# Altium PCB 矩形板V6.0(可制造).pcbdoc (part 1 of 2)
Units mm, origin at the board's own origin, x right, y up, seen from the top; angles counter-clockwise.
Board outline 153.79 x 190.97 mm, 2 copper layers (Top Layer, Bottom Layer); 164 components, 217 nets, 711 pads, 294 vias.
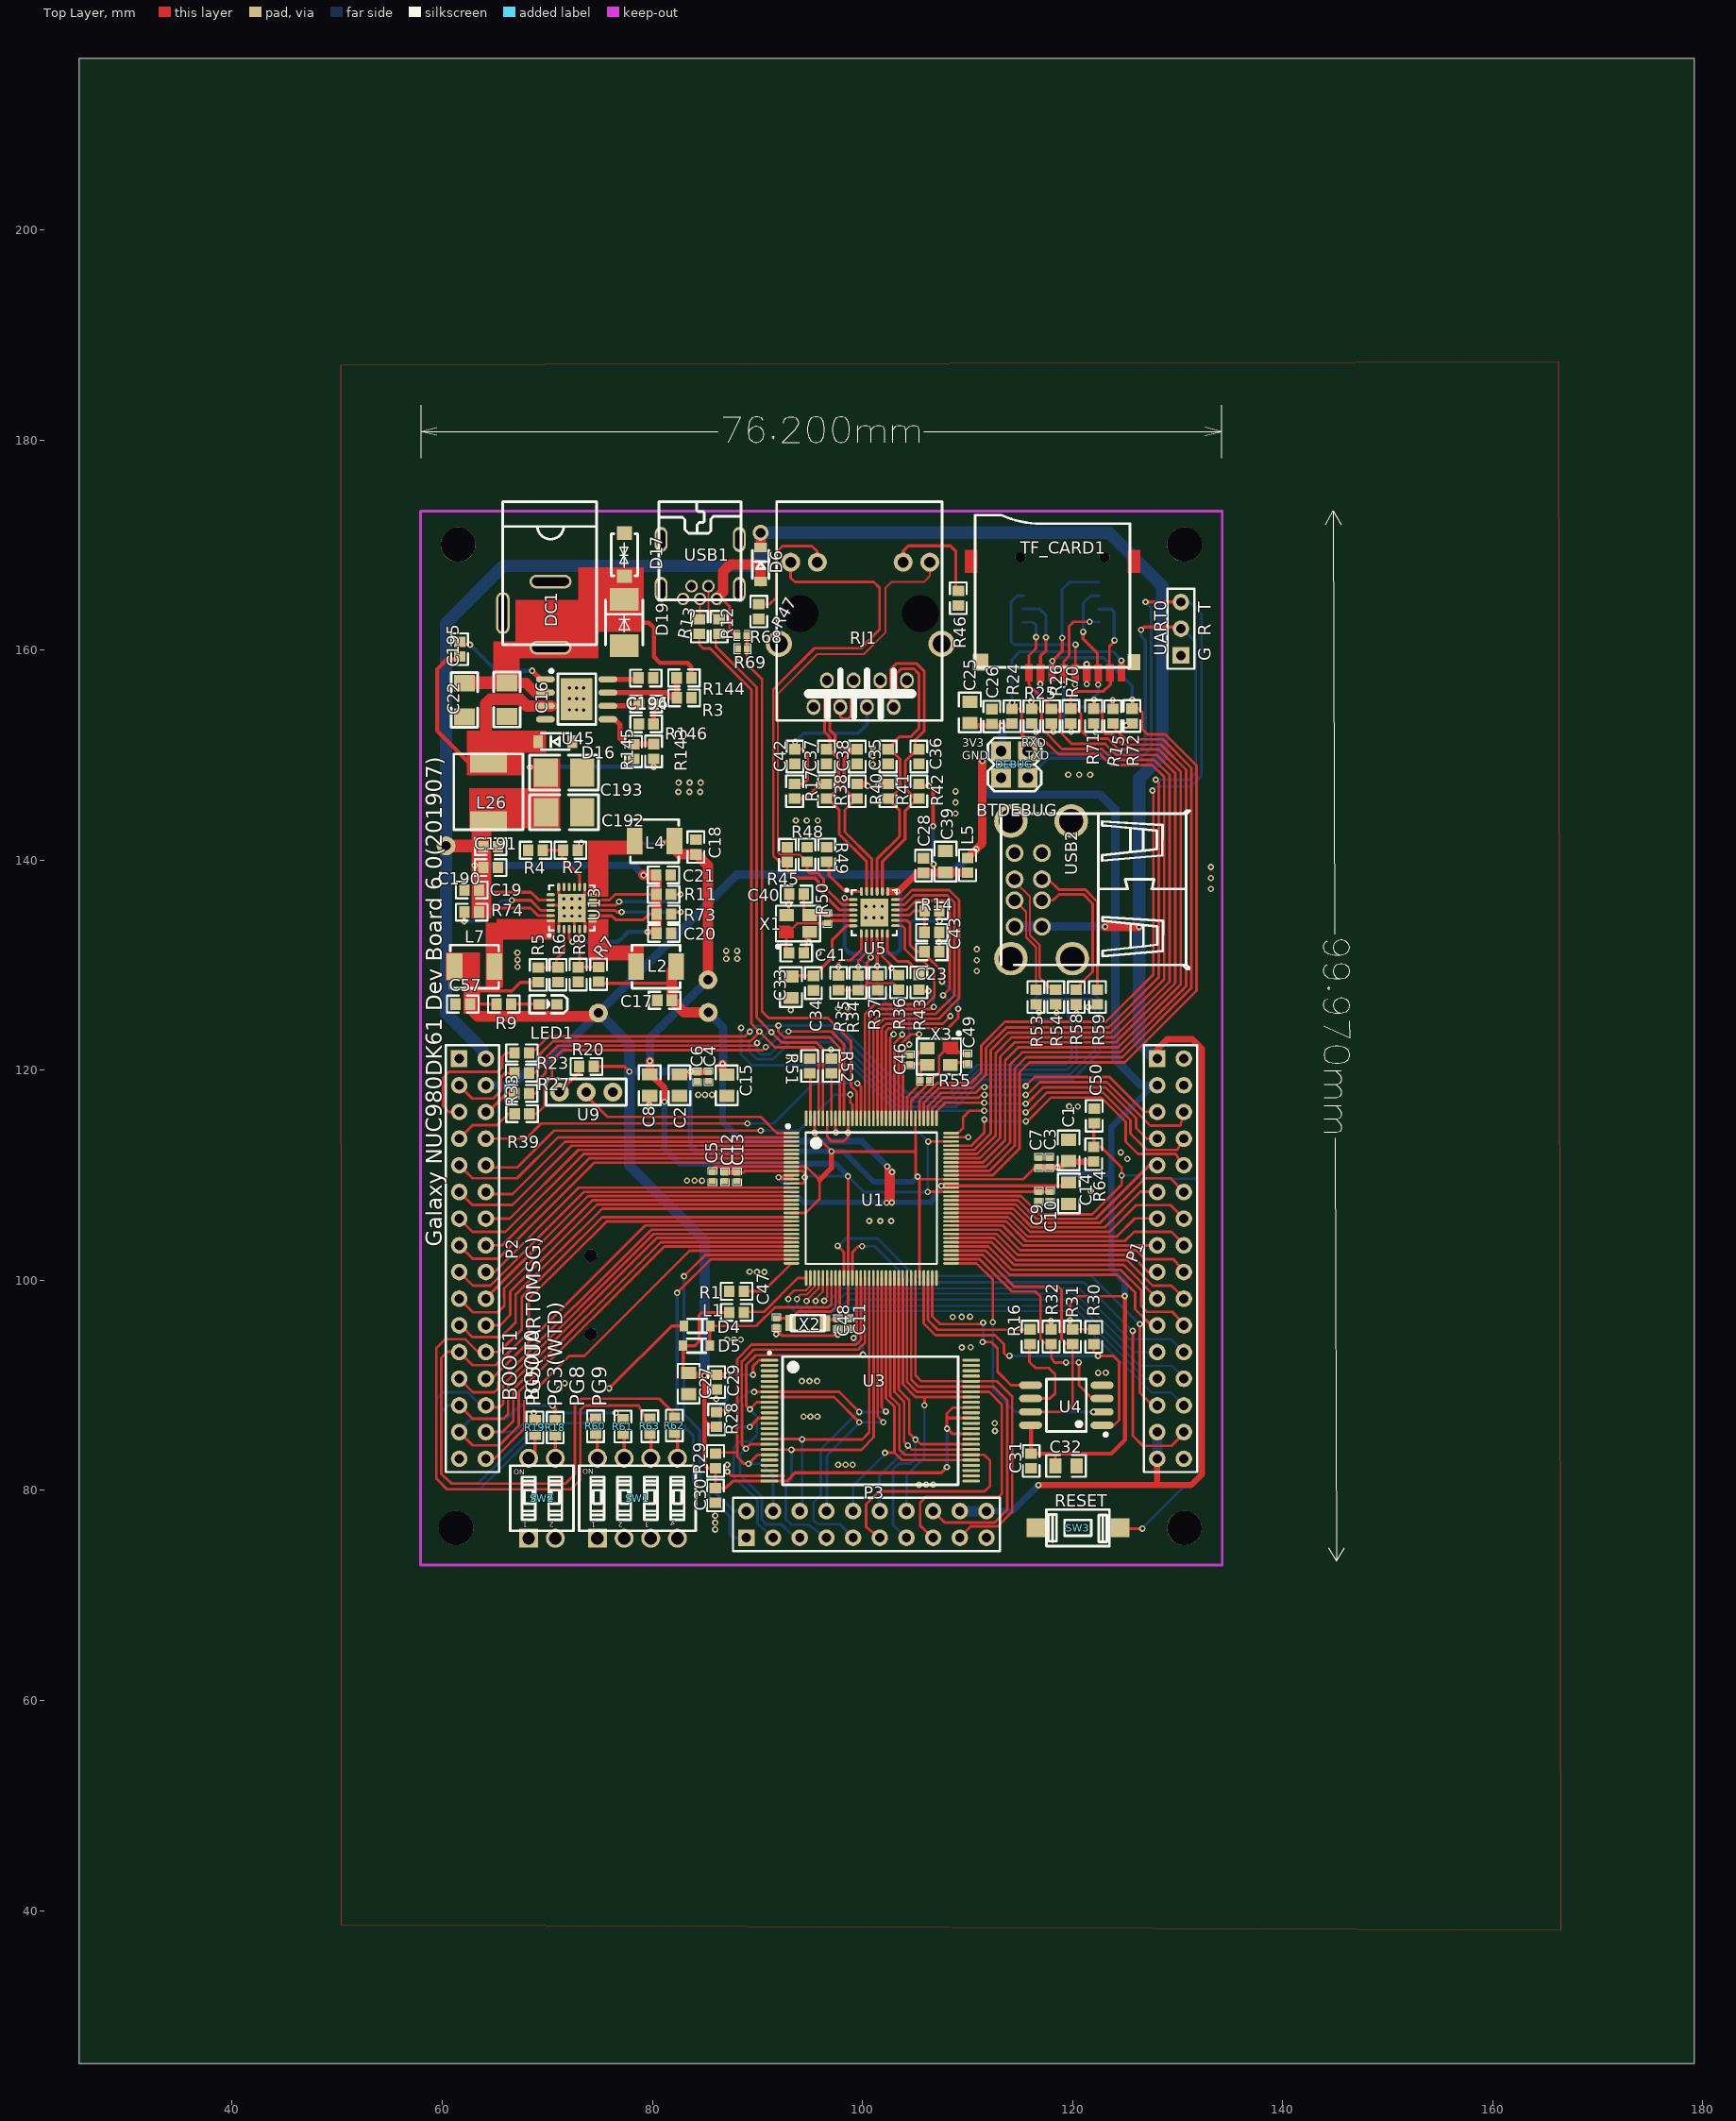
[diagram p0: Top Layer view]
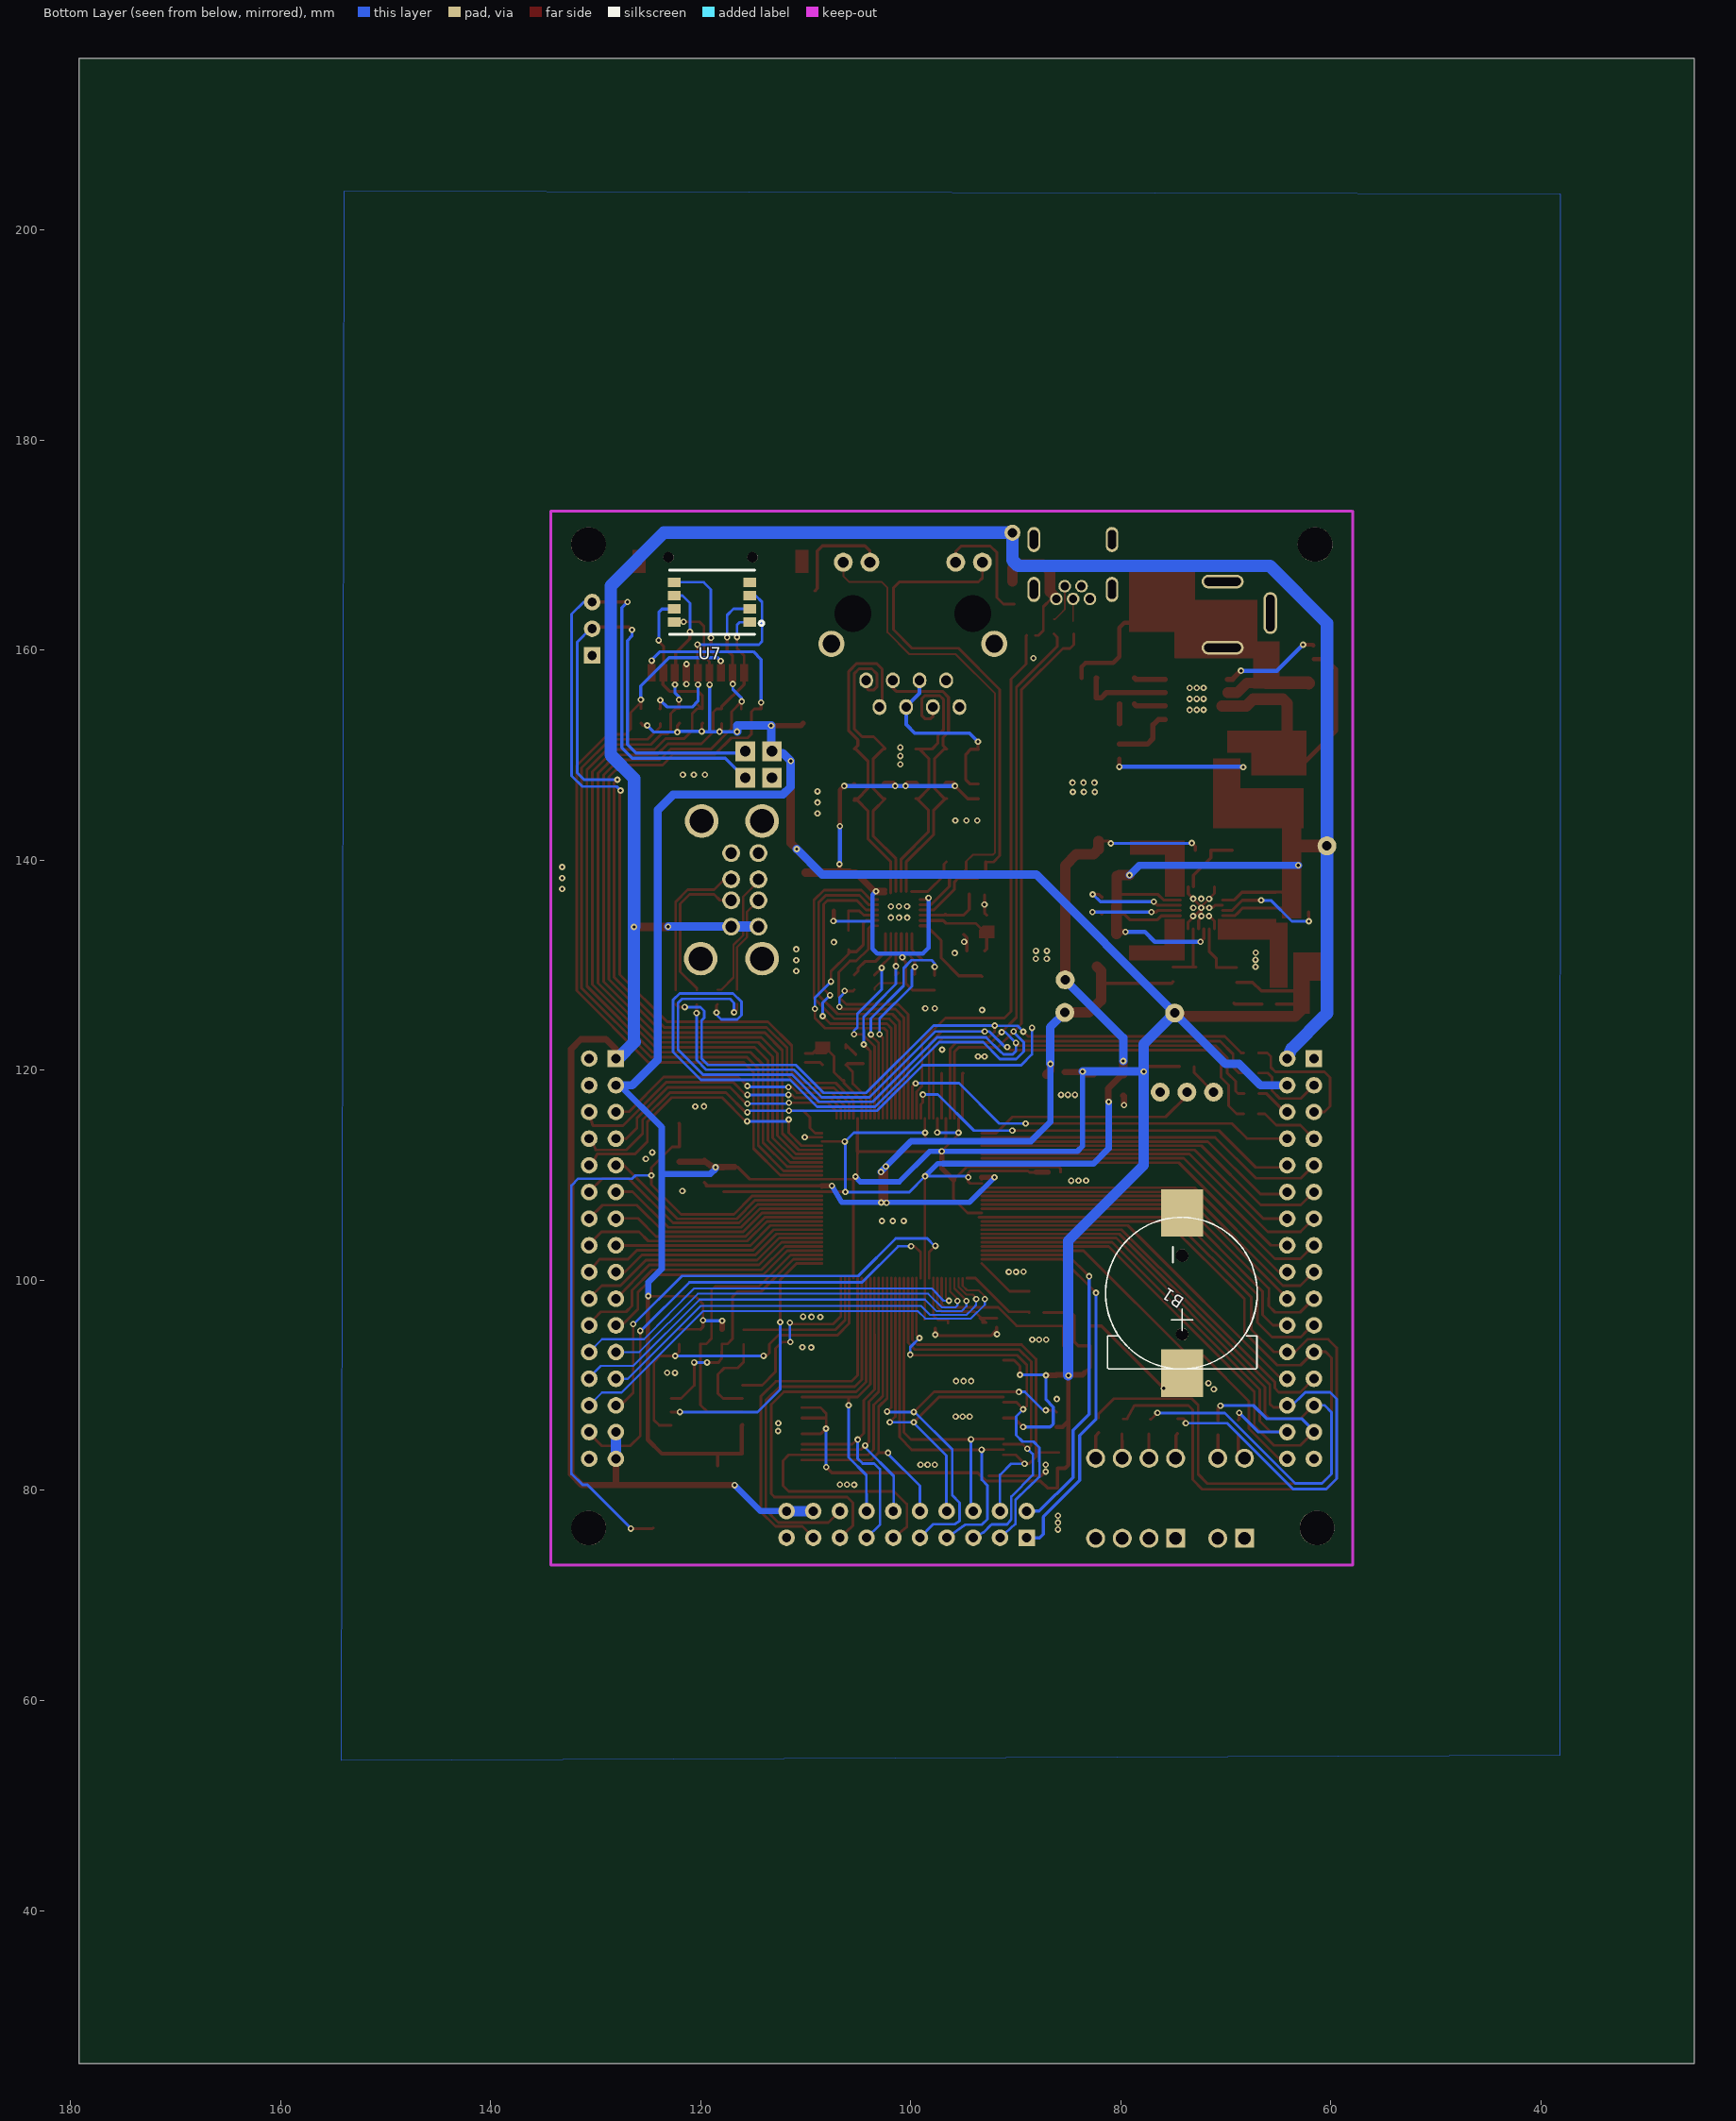
[diagram p1: Bottom Layer view, seen from below]

## Layer stack, top to bottom
Top Layer: signal copper (thickness not stored)
Dielectric: dielectric 0.32, FR-4, Dk 4.8
Bottom Layer: signal copper (thickness not stored)

## Board outline
179.187,25.4 25.4,25.4 25.4,216.368 179.187,216.368

## Components (designator, comment, footprint, x,y, rotation, side; value= is the part's Value field where it differs from the comment)
B1 "CR1220-2" BATTERY-2 74.141,98.779 r270 bottom
C1 "10uF" 0805 119.617,112.358 r270 top
C2 "10uF" 0805 82.583,118.59 r90 top
C3 "100nF" 0402 117.801,111.219 r270 top
C4 "100nF" 0402 85.341,119.399 r90 top
C5 "100nF" 0402 85.721,109.879 r90 top
C6 "100nF" 0402 84.261,119.379 r90 top
C7 "100nF" 0402 116.781,111.219 r270 top
C8 "10uF" 0805 79.751,118.589 r90 top
C9 "100nF" 0402 116.781,107.999 r90 top
C10 "100nF" 0402 117.861,107.999 r90 top
C11 "100nF" 0402 98.681,95.879 r90 top
C12 "100nF" 0402 86.901,109.859 r90 top
C13 "100nF" 0402 88.061,109.859 r90 top
C14 "10uF" 0805 119.641,108.299 r90 top
C15 "10uF" 0805 87.081,118.579 r90 top
C16 "10uF" 1206 66.151,155.289 r90 top
C17 "10uF" 0603 81.161,126.659 r0 top
C18 "22uF" 0603 84.141,141.249 r270 top
C19 "10uF" 0603 62.801,137.159 r0 top
C20 "10uF" 0603 81.101,133.039 r180 top
C21 "10uF" 0603 81.061,138.599 r180 top
C22 "10uF" 1206 62.111,155.249 r90 top
C23 "15pF" 0603 106.601,131.279 r180 top
C25 "10uF" 0805 110.221,154.063 r270 top
C26 "100nF" 0603 112.321,153.679 r270 top
C27 "10uF" 0805 83.444,90.173 r90 top
C28 "100nF" 0603 105.811,139.489 r270 top
C29 "100nF" 0603 86.111,90.3 r270 top
C30 "100nF" 0603 86.001,79.519 r90 top
C31 "100nF" 0603 116.061,82.799 r270 top
C32 "10uF" 0805 119.391,82.323 r0 top
C33 "10uF" 0805 93.191,127.903 r270 top
C34 "100nF" 0603 95.331,128.299 r270 top
C35 "10pF" 0603 102.437,149.869 r270 top
C36 "10pF" 0603 105.371,149.869 r270 top
C37 "10pF" 0603 96.571,149.869 r270 top
C38 "10pF" 0603 99.504,149.869 r270 top
C39 "10uF" 0805 107.911,139.853 r270 top
C40 "22pF" 0603 93.721,136.769 r180 top
C41 "22pF" 0603 93.701,131.169 r180 top
C42 "22nF" 0603 93.571,149.869 r270 top
C43 "100nF" 0603 106.601,133.119 r180 top
C46 "15pF" 0402 104.501,120.989 r270 top
C47 "15pF" 0402 91.801,95.959 r90 top
C48 "15pF" 0402 97.641,95.869 r90 top
C49 "15pF" 0402 110.021,121.079 r90 top
C50 "1uF" 0603 122.067,115.658 r270 top
C57 "10uF" 0603 61.951,126.299 r0 top
C190 "10nF" 0603 64.601,139.299 r0 top
C191 "100nF" 0603 64.611,141.289 r0 top
C192 "47uF" 1210 71.611,144.549 r0 top
C193 "47uF" 1210 71.601,148.319 r0 top
C194 "10nF" 0603 79.371,157.339 r180 top
C195 "10nF" 0603 61.651,160.089 r90 top
C196 "3.3nF" 0603 79.411,154.859 r180 top
D4 "1N4148WS T4" SOD-323 84.261,95.659 r0 top
D5 "1N4148WS T4" SOD-323 84.201,93.779 r0 top
D6 "DSK14" SOD-123 90.311,168.164 r270 top
D16 "SK34WA" SOD-123F 70.751,151.299 r180 top
D17 "SMAJ16CA_C152120" SMA(DO-214AC)-DOB 77.341,169.086 r270 top
D19 "BEP0300SC" SMB(DO-214AA) 77.331,162.619 r90 top
DC1 "DC005-2.5MM" DC-5020 68.031,163.379 r270 top
DEBUG "BTDEBUG" 4PINO 115.741,147.839 r180 top
L1 "0Ω" 0603 88.022,96.939 r0 top
L2 "1.5uH" L-SMD-4.1X4.6 80.351,129.859 r180 top
L4 "1uH" L-SMD-4.1X4.6 80.211,141.819 r180 top
L5 "220Ω" 0603 110.01,139.509 r270 top
L7 "1.5uH" L-SMD-4.1X4.6 63.061,129.859 r0 top
L26 "15uH" SMD-L-7.1X6.6 64.391,146.509 r0 top
LED1 "19-217/GHC-YR1S2/3T" LED-0603 70.081,126.279 r180 top
P1 "Header-Female-2.54_2x16" HDR-16X2/2.54#1 130.601,100.789 r270 top
P2 "Header-Female-2.54_2x16" HDR-16X2/2.54#2 64.151,100.789 r270 top
P3 "Header-Female-2.54_2x10" HDR-10X2/2.54 100.381,76.759 r0 top
R1 "0" 0603 88.021,98.959 r0 top
R2 "100K" 0603 72.201,140.949 r0 top
R3 "47K" 0603 83.031,155.459 r180 top
R4 "100K" 0603 68.881,140.949 r0 top
R5 "510K" 0603 69.141,129.079 r270 top
R6 "110K" 0603 71.021,129.099 r90 top
R7 "200K" 0603 74.891,129.139 r270 top
R8 "100K" 0603 72.941,129.109 r90 top
R9 "1K" 0603 65.861,126.299 r0 top
R11 "1K" 0603 81.071,136.749 r0 top
R12 "27" 0603 86.351,162.239 r270 top
R13 "27" 0603 84.471,162.239 r270 top
R14 "4.7K" 0603 106.612,135.178 r0 top
R15 "0" 0603 123.841,153.719 r90 top
R16 "0" 0603 115.961,94.639 r90 top
R17 "0" 0603 93.541,146.559 r270 top
R18 "10K" 0603 70.751,85.979 r270 top
R19 "10K" 0603 68.821,85.989 r270 top
R20 "10K" 0603 73.721,120.359 r0 top
R23 "4.7" 0603 67.581,121.649 r180 top
R24 "10K" 0603 114.241,153.709 r270 top
R25 "10K" 0603 116.131,153.719 r270 top
R26 "10K" 0603 117.991,153.709 r270 top
R27 "4.7" 0603 67.571,119.739 r0 top
R28 "100K" 0603 86.111,86.744 r270 top
R29 "100K" 0603 86.017,82.808 r90 top
R30 "10K" 0603 122.021,94.619 r90 top
R31 "10K" 0603 120.001,94.639 r90 top
R32 "10K" 0603 117.961,94.639 r90 top
R33 "4.7" 0603 67.551,117.789 r0 top
R34 "4.7K" 0603 99.581,128.319 r90 top
R35 "4.7K" 0603 97.731,128.319 r90 top
R36 "4.7K" 0603 103.451,128.359 r90 top
R37 "4.7K" 0603 101.441,128.319 r90 top
R38 "49.9" 0603 96.571,146.559 r90 top
R39 "4.7" 0603 67.591,115.859 r180 top
R40 "49.9" 0603 99.504,146.559 r90 top
R41 "49.9" 0603 102.437,146.559 r90 top
R42 "49.9" 0603 105.371,146.559 r90 top
R43 "510" 0603 105.371,128.359 r90 top
R45 "10K" 0603 92.851,140.519 r270 top
R46 "470" 0603 109.131,164.939 r90 top
R47 "470" 0603 90.131,163.669 r90 top
R48 "10K" 0603 94.721,140.549 r270 top
R49 "12.1K" 0603 96.601,140.539 r270 top
R50 "1M" 0402 96.667,134.448 r90 top
R51 "12.1K" 0603 94.971,120.409 r270 top
R52 "12.1K" 0603 97.041,120.413 r270 top
R53 "4.7" 0603 116.521,126.969 r270 top
R54 "4.7" 0603 118.401,126.979 r270 top
R55 "1M" 0402 105.937,119.039 r180 top
R58 "4.7" 0603 120.351,126.959 r270 top
R59 "4.7" 0603 122.371,126.969 r270 top
R60 "10K" 0603 74.591,86.109 r270 top
R61 "10K" 0603 77.201,86.089 r270 top
R62 "10K" 0603 82.101,86.189 r270 top
R63 "10K" 0603 79.761,86.109 r270 top
R64 "100K" 0603 122.017,112.008 r270 top
R68 "20K" 0402 88.541,161.389 r180 top
R69 "39K" 0402 88.581,160.139 r0 top
R70 "10K" 0603 119.831,153.729 r270 top
R71 "10K" 0603 122.011,153.729 r270 top
R72 "10K" 0603 125.661,153.729 r270 top
R73 "1K" 0603 81.091,134.869 r0 top
R74 "1K" 0603 62.801,135.059 r0 top
R143 "52.3K" 0603 80.121,150.359 r270 top
R144 "100K" 0603 83.011,157.349 r180 top
R145 "10K" 0603 78.211,150.349 r90 top
R146 "6.98K" 0603 79.411,152.979 r0 top
RJ1 "HR911105A" RJ45-LIGHT 99.791,161.477 r180 top
SW1 "NDI-04H-V" NDI-04H-V 78.581,79.249 r0 top
SW2 "NDI-02H-V" NDI-02H-V 69.491,79.249 r0 top
SW3 "RESET" KEY-TOUCH-SMD-6.0*3.5*H-(A) 120.511,76.429 r0 top
TF_CARD1 "TF_CARD" TF-115_MRS 124.651,157.849 r90 top
U1 "NUC980DK61Y" LQFP-128_14X14X04P 100.841,107.819 r0 top
U3 "MT29F2G08ABAEAWP-IT:E" TSOP-48 100.751,86.639 r90 top
U4 "W25Q128JVSIQTR" SOIC-8_208MIL 119.411,88.109 r180 top
U5 "LAN8720AI" QFN-24_4X4X05P 101.131,135.021 r0 top
U7 "MKDV4GIL-AS" LGA-8_8PIN-L6.10-W8.10-PITCH0.65-TL 118.901,164.559 r180 bottom
U9 "3pin插针" 3PIN插针 76.241,117.919 r180 top
U13 "EA3059C" QFN-24_4X4X05P 72.318,135.449 r90 top
U45 "MP2303ADN-LF-Z" SOIC-8_EP_150MIL 72.791,155.319 r0 top
UART0 "2.54排针 3pin" HDR-3X1/2.54 130.321,162.039 r90 top
USB1 "Mini USB-B 5P-Female-TH_C46398" USB-MINI-2 84.551,167.706 r180 top
USB2 "Double layer DIP 90° black" USB-M-51 117.061,137.179 r90 top
X1 "25MHz" OSC-YSX-3225_4P 93.861,133.969 r0 top
X2 "32.768KHz" SMD-3215_2P 94.801,95.939 r0 top
X3 "12MHz" OSC-YSX-3225_4P 107.271,121.309 r180 top
? "" ? 96.061,180.791 r0 top
? "" ? 145.141,123.249 r0 top

## Footprints (in the part's own frame and the unit in brackets; to place one, negate y for a bottom-side part, rotate by r counter-clockwise, add the part's x,y. Pads: shape width x height; smd on the part's side, far side on the other; paste and mask are expansions set on the pad)
3PIN插针 [mm]
  round 1.8 hole 0.9: 1(0,0) 2(2.54,0) 3(5.08,0)
  silkscreen extent -1.27,-1.27 6.35,1.27
4PINO [mil]
  rect 74x74 hole 40: a(0,0) b(100,0) c(0,-100) d(100,-100)
  silkscreen extent -50,-150 150,50
0402 [mm]
  rect 0.6x0.65 smd: 1(-0.424,0) 2(0.424,0)
  silkscreen extent -0.82,-0.43 0.81,0.43
0603 [mm]
  rect 1x1.1 smd: 1(-0.7,0) 2(0.7,0)
  silkscreen extent -1.5,-0.8 1.5,0.8
0805 [mm]
  rect 1.16x1.45 smd: 1(-1.016,0) 2(1.016,0)
  silkscreen extent -1.9,-1.03 1.87,1.04
1206 [mm]
  rect 1.6x2 smd: 1(-1.6,0) 2(1.6,0)
  silkscreen extent -2.61,-1.27 2.62,1.27
1210 [mil]
  rect 90.56x106.3 smd: 1(-68,0) 2(68,0)
  silkscreen extent -130,-65 129,66
BATTERY-2 [mm]
  round 1.2 hole 1.2: 0(-3.581,0) 0(3.912,0)
  rect 4.5x4 smd: 1(7.62,0) 2(-7.62,0)
  silkscreen extent -7.22,-7.3 7.22,7.14
DC-5020 [mm]
  oval 1.3x3.999 hole 0.8 slot 3.5 at 90 deg: 1(3.15,2.275) 2(-3.15,2.275)
  oval 3.999x1.3 hole 0.8 slot 3.5 at 0 deg: 3(-0.15,-2.275)
  silkscreen extent -10.75,-2.28 2.85,6.67
HDR-3X1/2.54 [mil]
  rect 62x62 hole 35: 1(-100,0)
  round 62 hole 35: 2(0,0) 3(100,0)
  silkscreen extent -150,-50 150,50
HDR-10X2/2.54 [mil]
  rect 62x62 hole 35: 1(-450,-50)
  round 62 hole 35: 2(-450,50) 3(-350,-50) 4(-350,50) 5(-250,-50) 6(-250,50) 7(-150,-50) 8(-150,50) 9(-50,-50) 10(-50,50) 11(50,-50) 12(50,50) 13(150,-50) 14(150,50) 15(250,-50) 16(250,50) 17(350,-50) 18(350,50) 19(450,-50) 20(450,50)
  silkscreen extent -500,-100 500,100
HDR-16X2/2.54#1 [mil]
  rect 62x62 hole 35: 1(-800,-100)
  round 62 hole 35: 2(-800,0) 3(-700,-100) 4(-700,0) 5(-600,-100) 6(-600,0) 7(-500,-100) 8(-500,0) 9(-400,-100) 10(-400,0) 11(-300,-100) 12(-300,0) 13(-200,-100) 14(-200,0) 15(-100,-100) 16(-100,0) 17(0,-100) 18(0,0) 19(100,-100) 20(100,0) 21(200,-100) 22(200,0) 23(300,-100) 24(300,0) 25(400,-100) 26(400,0) 27(500,-100) 28(500,0) 29(600,-100) 30(600,0) 31(700,-100) 32(700,0)
  silkscreen extent -850,-150 750,50
HDR-16X2/2.54#2 [mil]
  rect 62x62 hole 35 copper offset 0.02,-0.01: 1(-800,-100.01)
  round 62 hole 35: 2(-800,-0.01) 3(-700,-100.01) 4(-700,-0.01) 5(-600,-100.01) 6(-600,-0.01) 7(-500,-100.01) 8(-500,-0.01) 9(-400,-100.01) 10(-400,-0.01) 11(-300,-100.01) 12(-300,-0.01) 13(-200,-100.01) 14(-200,-0.01) 15(-100,-100.01) 16(-100,-0.01) 17(0,-100.01) 18(0,-0.01) 19(100,-100.01) 20(100,-0.01) 21(200,-100.01) 22(200,-0.01) 23(300,-100.01) 24(300,-0.01) 25(400,-100.01) 26(400,-0.01) 27(500,-100.01) 28(500,-0.01) 29(600,-100.01) 30(600,-0.01) 31(700,-100.01) 32(700,-0.01)
  silkscreen extent -850,-150 750,50
KEY-TOUCH-SMD-6.0*3.5*H-(A) [mm]
  rect 1.8x1.8 smd: 1(-4,0) 2(4,0)
  silkscreen extent -3,-1.75 3,1.75
L-SMD-4.1X4.6 [mm]
  rect 1.5x2.5 smd: 1(-1.9,0) 2(1.9,0)
  silkscreen extent -2.3,-2.05 2.3,2.05
LED-0603 [mil]
  rect 43x39 smd: 1(33.5,0) 2(-33.5,0)
  silkscreen extent -72,-34 70,34
LGA-8_8PIN-L6.10-W8.10-PITCH0.65-TL [mm]
  rect 1.2x0.9 smd: 1(3.6,-1.905) 2(3.6,-0.635) 3(3.6,0.635) 4(3.6,1.905) 5(-3.6,1.905) 6(-3.6,0.635) 7(-3.6,-0.635) 8(-3.6,-1.905)
  silkscreen extent -4.05,-3.05 4.92,3.05
LQFP-128_14X14X04P [mm]
  oval 1.5x0.25 smd: 1(-7.6,6.2) 2(-7.6,5.799) 3(-7.6,5.4) 4(-7.6,5.001) 5(-7.6,4.6) 6(-7.6,4.201) 7(-7.6,3.8) 8(-7.6,3.401) 9(-7.6,3) 10(-7.6,2.601) 11(-7.6,2.2) 12(-7.6,1.801) 13(-7.6,1.4) 14(-7.6,1.001) 15(-7.6,0.599) 16(-7.6,0.201) 17(-7.6,-0.201) 18(-7.6,-0.599) 19(-7.6,-1.001) 20(-7.6,-1.4) 21(-7.6,-1.801) 22(-7.6,-2.2) 23(-7.6,-2.601) 24(-7.6,-3) 25(-7.6,-3.401) 26(-7.6,-3.8) 27(-7.6,-4.201) 28(-7.6,-4.6) 29(-7.6,-5.001) 30(-7.6,-5.4) 31(-7.6,-5.799) 32(-7.6,-6.2) 65(7.6,-6.2) 66(7.6,-5.799) 67(7.6,-5.4) 68(7.6,-5.001) 69(7.6,-4.6) 70(7.6,-4.201) 71(7.6,-3.8) 72(7.6,-3.401) 73(7.6,-3) 74(7.6,-2.601) 75(7.6,-2.2) 76(7.6,-1.801) 77(7.6,-1.4) 78(7.6,-1.001) 79(7.6,-0.599) 80(7.6,-0.201) 81(7.6,0.201) 82(7.6,0.599) 83(7.6,1.001) 84(7.6,1.4) 85(7.6,1.801) 86(7.6,2.2) 87(7.6,2.601) 88(7.6,3) 89(7.6,3.401) 90(7.6,3.8) 91(7.6,4.201) 92(7.6,4.6) 93(7.6,5.001) 94(7.6,5.4) 95(7.6,5.799) 96(7.6,6.2)
  oval 0.25x1.5 smd: 33(-6.2,-7.6) 34(-5.799,-7.6) 35(-5.4,-7.6) 36(-5.001,-7.6) 37(-4.6,-7.6) 38(-4.201,-7.6) 39(-3.8,-7.6) 40(-3.401,-7.6) 41(-3,-7.6) 42(-2.601,-7.6) 43(-2.2,-7.6) 44(-1.801,-7.6) 45(-1.4,-7.6) 46(-1.001,-7.6) 47(-0.599,-7.6) 48(-0.201,-7.6) 49(0.201,-7.6) 50(0.599,-7.6) 51(1.001,-7.6) 52(1.4,-7.6) 53(1.801,-7.6) 54(2.2,-7.6) 55(2.601,-7.6) 56(3,-7.6) 57(3.401,-7.6) 58(3.8,-7.6) 59(4.201,-7.6) 60(4.6,-7.6) 61(5.001,-7.6) 62(5.4,-7.6) 63(5.799,-7.6) 64(6.2,-7.6) 97(6.2,7.6) 98(5.799,7.6) 99(5.4,7.6) 100(5.001,7.6) 101(4.6,7.6) 102(4.201,7.6) 103(3.8,7.6) 104(3.401,7.6) 105(3,7.6) 106(2.601,7.6) 107(2.2,7.6) 108(1.801,7.6) 109(1.4,7.6) 110(1.001,7.6) 111(0.599,7.6) 112(0.201,7.6) 113(-0.201,7.6) 114(-0.599,7.6) 115(-1.001,7.6) 116(-1.4,7.6) 117(-1.801,7.6) 118(-2.2,7.6) 119(-2.601,7.6) 120(-3,7.6) 121(-3.401,7.6) 122(-3.8,7.6) 123(-4.201,7.6) 124(-4.6,7.6) 125(-5.001,7.6) 126(-5.4,7.6) 127(-5.799,7.6) 128(-6.2,7.6)
  silkscreen extent -8.07,-6.25 6.25,7
NDI-02H-V [mm]
  rect 1.8x1.8 hole 1.2: 1(-1.27,-3.81)
  round 1.8 hole 1.2: 2(1.27,-3.81) 3(1.27,3.81) 4(-1.27,3.81)
  silkscreen extent -3.01,-3.1 3.01,3.1
NDI-04H-V [mm]
  rect 1.8x1.8 hole 1.2: 1(-3.81,-3.81)
  round 1.8 hole 1.2: 2(-1.27,-3.81) 3(1.27,-3.81) 4(3.81,-3.81) 5(3.81,3.81) 6(1.27,3.81) 7(-1.27,3.81) 8(-3.81,3.81)
  silkscreen extent -5.55,-3.1 5.55,3.1
OSC-YSX-3225_4P [mm]
  round 0 smd: 1(-1.1,-0.8)
  rect 1.4x1.15 smd: 2(1.1,-0.8) 3(1.1,0.8) 4(-1.1,0.8)
  Top Layer region: -1.8,-0.225 -0.762,-0.225 -0.4,-0.604 -0.4,-1.375 -1.8,-1.375
  silkscreen extent -2.1,-2.35 2.1,1.7
QFN-24_4X4X05P [mm]
  oval 0.796x0.28 smd: 1(-2,1.232) 2(-2,0.732) 3(-2,0.231) 4(-2,-0.267) 5(-2,-0.767) 6(-2,-1.267) 13(2,-1.257) 14(2,-0.757) 15(2,-0.257) 16(2,0.241) 17(2,0.742) 18(2,1.242)
  oval 0.28x0.796 smd: 7(-1.245,-2) 8(-0.744,-2) 9(-0.244,-2) 10(0.254,-2) 11(0.754,-2) 12(1.255,-2) 19(1.27,2) 20(0.77,2) 21(0.269,2) 22(-0.229,2) 23(-0.729,2) 24(-1.229,2)
  rect 2.68x2.68 smd: 25(0,-0.013)
  silkscreen extent -2.84,-2.16 2.15,2.35
RJ45-LIGHT [mm]
  oval 1.3x1.499 hole 0.914: 1(-4.445,4.355) 2(-3.175,6.895) 3(-1.905,4.355) 4(-0.635,6.895) 5(0.635,4.355) 6(1.905,6.895) 7(3.175,4.355) 8(4.445,6.895)
  round 1.8 hole 1.04: 9(-6.625,-6.895) 10(-4.085,-6.895) 11(4.085,-6.895) 12(6.625,-6.895)
  round 2.5 hole 1.702: 13(-7.75,0.875) 14(7.75,0.875)
  round 2 hole 3.5 unplated: 15(5.715,-1.995) 16(-5.715,-1.995)
  silkscreen extent -7.78,-12.65 7.96,8.18
SMA(DO-214AC)-DOB [mil]
  rect 50x57.9 smd: 1(-81,0) 2(81,0)
  silkscreen extent -78,-49 79,49
SMB(DO-214AA) [mil]
  rect 85x108 smd: 1(-87,0) 2(87,0)
  silkscreen extent -85,-70 85,70
SMD-3215_2P [mm]
  rect 1x1.524 smd: 1(-1.648,0.024) 2(1.648,-0.024)
  silkscreen extent -1.6,-0.75 1.6,0.75
SMD-L-7.1X6.6 [mm]
  rect 3.5x1.9 smd: 1(0,2.8) 2(0,-2.8)
  silkscreen extent -3.3,-3.6 3.3,3.6
SOD-123 [mil]
  rect 35.8x48 smd: 1(64,0) 2(-64,0)
  silkscreen extent -53,-31 53,31
SOD-123F [mil]
  rect 35.8x48 smd: 1(-64,0) 2(64,0)
  silkscreen extent -53,-31 53,31
SOD-323 [mm]
  rect 0.8x1 smd: 1(-1.27,0) 2(1.27,0)
  silkscreen extent -0.89,-0.66 0.89,0.66
SOIC-8_208MIL [mm]
  oval 2.2x0.7 smd: 1(-3.4,1.905) 2(-3.4,0.635) 3(-3.4,-0.635) 4(-3.4,-1.905) 5(3.4,-1.905) 6(3.4,-0.635) 7(3.4,0.635) 8(3.4,1.905)
  silkscreen extent -3.9,-2.5 1.9,2.95
SOIC-8_EP_150MIL [mm]
  oval 1.798x0.6 smd: 1(-2.972,1.905) 2(-2.972,0.635) 3(-2.972,-0.635) 4(-2.972,-1.905) 5(2.972,-1.905) 6(2.972,-0.635) 7(2.972,0.635) 8(2.972,1.905)
  rect 3x4 smd: 9(0,0)
  silkscreen extent -2.56,-2.39 1.83,2.84
TF-115_MRS [mm]
  round 0 smd: 1(0,8.8) 2(0,7.7) 3(0,6.6) 4(0,5.5) 5(0,4.4) 6(0,3.3) 7(0,2.2) 8(0,1.1) 9(0,0) 11(10.6,-1.2) 12(10.6,14.3)
  rect 1.5x1.2 smd: 10(1,-1.2)
  rect 1.6x1.5 smd: 13(1,13.4)
  round 1 hole 1 unplated: ""(11,1.6) ""(11,9.6)
  Top Layer region: -0.8,-0.351 -0.8,0.351 0.8,0.351 0.8,-0.351
  Top Layer region: -0.8,0.749 -0.8,1.45 0.8,1.45 0.8,0.749
  Top Layer region: -0.8,1.849 -0.8,2.55 0.8,2.55 0.8,1.849
  Top Layer region: -0.8,2.949 -0.8,3.65 0.8,3.65 0.8,2.949
  Top Layer region: -0.8,4.049 -0.8,4.75 0.8,4.75 0.8,4.049
  Top Layer region: -0.8,5.151 -0.8,5.85 0.8,5.85 0.8,5.151
  Top Layer region: -0.8,6.251 -0.8,6.949 0.8,6.949 0.8,6.251
  Top Layer region: -0.8,7.351 -0.8,8.049 0.8,8.049 0.8,7.351
  Top Layer region: -0.8,8.451 -0.8,9.149 0.8,9.149 0.8,8.451
  Top Layer region: 9.499,13.701 9.499,14.9 11.699,14.9 11.699,13.701
  Top Layer region: 9.499,-1.801 9.499,-0.6 11.699,-0.6 11.699,-1.801
  silkscreen extent 0.5,-0.82 15,13.92
TSOP-48 [mm]
  oval 0.28x1.696 smd: 1(5.75,9.6) 2(5.25,9.6) 3(4.75,9.6) 4(4.25,9.6) 5(3.75,9.6) 6(3.25,9.6) 7(2.75,9.6) 8(2.25,9.6) 9(1.75,9.6) 10(1.25,9.6) 11(0.75,9.6) 12(0.25,9.6) 13(-0.25,9.6) 14(-0.75,9.6) 15(-1.25,9.6) 16(-1.75,9.6) 17(-2.25,9.6) 18(-2.75,9.6) 19(-3.25,9.6) 20(-3.75,9.6) 21(-4.25,9.6) 22(-4.75,9.6) 23(-5.25,9.6) 24(-5.75,9.6) 25(-5.75,-9.6) 26(-5.25,-9.6) 27(-4.75,-9.6) 28(-4.25,-9.6) 29(-3.75,-9.6) 30(-3.25,-9.6) 31(-2.75,-9.6) 32(-2.25,-9.6) 33(-1.75,-9.6) 34(-1.25,-9.6) 35(-0.75,-9.6) 36(-0.25,-9.6) 37(0.25,-9.6) 38(0.75,-9.6) 39(1.25,-9.6) 40(1.75,-9.6) 41(2.25,-9.6) 42(2.75,-9.6) 43(3.25,-9.6) 44(3.75,-9.6) 45(4.25,-9.6) 46(4.75,-9.6) 47(5.25,-9.6) 48(5.75,-9.6)
  silkscreen extent -6.1,-8.35 6.58,9.72
USB-M-51 [mm]
  round 3.2 hole 2.3: 0(-6.551,-2.925) 0(-6.551,2.925) 0(6.551,-2.826) 0(6.551,2.925)
  round 1.7 hole 1.1: 1(-3.5,2.574) 2(-1.001,2.574) 3(1.001,2.574) 4(3.5,2.574) 5(-3.5,-0.027) 6(-1.001,-0.027) 7(1.001,-0.027) 8(3.5,-0.027)
  silkscreen extent -7.52,-14.13 7.54,3.87
USB-MINI-2 [mm]
  oval 1.2x2.4 hole 0.8 slot 1.8 at 90 deg copper offset 0,0: 0(-3.72,-2.826) 0(-3.72,1.924)
  oval 1.2x2.4 hole 0.8 slot 1.8 at 90 deg copper offset -0.001,0: 0(3.72,-2.826) 0(3.72,1.924)
  round 1.2 hole 0.8: 1(-1.58,2.826) 2(-0.78,1.622) 3(0.02,2.826) 4(0.82,1.622) 5(1.62,2.826)
  silkscreen extent -3.89,-6.42 3.96,2.93
? [mm]
  silkscreen extent -38.1,-2.51 38.1,2.51

## Free pads (board coordinates)
  round 1.524 hole 0.914: 8(90.311,171.179)
  round 1.8 hole 0.9: 9(60.361,141.359) 9(74.861,125.449) 9(85.291,128.609) 9(85.321,125.499)
  round 3.302 hole 3.302 unplated: ""(61.311,76.419) ""(61.501,170.059) ""(130.651,76.419) ""(130.671,170.059)

## Via types
v1: diameter 0.61, hole 0.305, Top Layer to Bottom Layer, 294 vias

## Nets (pads, with @x,y where several pads share a name; then routed paths per layer and width w, separated by ;. In a path a pad name is that pad's centre, name@x,y a point inside that pad or via, vN(x,y) a via of type N, cw(c..) or ccw(c..) an arc to the next point about the centre after c; other vN are vias at no path point)
1.2V: C8.2 C9.2 C10.2 C11.2 C12.2 C13.2 C18.2 L4.1 pad.9@85.291,128.609 R2.2 U1.10 U1.13 U1.43 U1.82 U1.94 U1.118 U1.123 | length 131.4
  Top Layer w0.25: U1.43@98.643,100.226 98.643,96.341 C11.2@98.681,96.303
  Top Layer w0.254: C13.2@88.061,110.283 88.684,110.283 88.821,110.42 91.801,110.42 U1.10@93.241,110.42
  Top Layer w0.26: U1.13@93.243,109.225 94.335,109.225 94.516,109.408 v1(94.516,109.808) 94.516,110.172 94.318,110.406 U1.10@93.243,110.426 ; U1.123@96.642,115.425 96.642,113.675 97.001,113.238 98.235,113.238 98.621,113.639 v1@98.616,114.058 ; v1@98.617,109.908 98.643,109.881 U1.43@98.643,100.226 ; v1(98.617,114.058) 98.643,114.084 U1.118@98.643,115.425 ; v1(106.217,108.408) 106.234,108.425 106.499,108.425 108.442,108.425 116.779,108.425 C9.2@116.781,108.423 ; v1(106.267,113.208) 106.285,113.226 U1.94@108.442,113.226 ; C9.2@116.66,108.44 C10.2@117.811,108.44
  Top Layer w0.3: R2.2@72.901,140.959 72.901,141.309 v1(73.231,141.639) ; v1(80.931,141.599) 81.151,141.819 L4.1@82.111,141.819
  Top Layer w0.5: C12.2@86.901,110.303 86.921,110.283 C13.2@88.061,110.283
  Top Layer w0.6: C8.2@79.782,119.634 79.825,119.634 81.192,118.27 81.192,117.038 v1(81.141,116.989)
  Top Layer w0.8: C8.2@79.751,119.605 79.761,119.615 v1(79.761,120.889)
  Top Layer w1: L4.1@82.111,141.819 82.111,141.038 82.591,140.558 C18.2@84.141,140.549 84.24,140.548 85.291,139.499 pad.9@85.291,128.609
  Bottom Layer w0.26: v1(94.516,109.808) 94.616,109.908 v1@98.617,109.908 ; v1@98.616,109.908 100.112,108.407 v1@106.216,108.407 ; v1(98.617,114.058) 105.417,114.059 v1(106.267,113.208) ; v1(106.217,108.408) 106.217,113.158 v1(106.267,113.208)
  Bottom Layer w0.3: v1(73.231,141.639) 73.271,141.599 v1(80.931,141.599)
  Bottom Layer w0.5: 96.901,111.119 97.404,111.119 v1@98.616,109.908
  Bottom Layer w0.6: v1(81.141,116.989) 81.141,112.559 82.601,111.099 96.902,111.119
  Bottom Layer w0.8: v1(79.761,120.889) 79.762,123.08 pad.9@85.291,128.609
  other v1: 98.617,109.908
1.8V: C14.2 C15.2 C17.2 L2.1 pad.9@85.321,125.499 R7.2 U1.11 U1.12 U1.83 U1.84 | length 82.9
  Top Layer w0.26: U1.12@93.241,109.62 93.243,109.622 U1.12@93.243,109.626 ; U1.83@108.44,108.82 108.44,108.824 U1.83@108.443,108.826
  Top Layer w0.3: R7.2@75.012,128.44 75.162,128.29 81.75,128.29 81.811,128.348 ; v1(107.501,108.999) 119.458,108.999 119.458,109.132 C14.2@119.641,109.315
  Top Layer w0.5: v1(92.017,109.808) 93.026,109.808 93.243,109.819 ; v1(102.301,107.379) 102.361,107.439 v1(102.361,110.839) ; v1(102.801,107.399) 102.821,107.419 v1(102.821,110.319) ; v1(107.501,108.999) 108.439,108.999 108.443,108.995
  Top Layer w0.8: v1(86.691,120.609) 86.691,119.985 C15.2@87.081,119.595
  Top Layer w1: C17.2@81.86,126.659 81.86,129.468 L2.1@82.251,129.859 ; C17.2@81.861,126.659 83.021,125.499 pad.9@85.321,125.499
  Bottom Layer w0.5: v1@92.017,109.799 94.417,107.409 106.561,107.439 v1(107.501,108.999)
  Bottom Layer w0.6: v1(86.691,120.609) 86.691,115.087 88.54,113.238 99.96,113.238 102.36,110.838 102.393,110.787 102.86,110.319 v1@102.82,110.319
  Bottom Layer w0.8: pad.9@85.321,125.499 86.731,124.088 86.731,120.65 v1(86.691,120.609)
3.3V: C1.2 C2.2 C3.2 C4.2 C5.2 C6.2 C7.2 C25.2 C26.2 C27.2 C29.1 C30.2 C31.1 C32.1 C57.2 D5.1 DEBUG.d L1.1 L5.1 L7.1 P1.3 P2.4 pad.9@74.861,125.449 R5.2 R9.1 R20.2 R24.2 R25.2 R26.2 R28.2 R29.1 R30.2 R31.2 R32.2 R64.2 R70.2 R71.2 R72.2 TF_CARD1.4 U1.9 U1.20 U1.60 U1.85 U1.102 U1.121 U1.126 U3.1 U3.12 U3.24 U3.34 U3.37 U3.39 U4.8 U7.8 | length 467.3
  Top Layer w0.25: C5.2@85.721,110.303 85.721,110.619 85.921,110.818 U1.9@93.241,110.819 ; v1(108.061,85.879) 108.031,85.909 108.031,87.309 108.611,87.889 U3.39@110.351,87.889 ; v1(119.761,96.189) 119.762,97.739 120.506,98.486 v1(124.971,98.509) ; R31.2@120.001,95.339 122.001,95.339 R30.2@122.021,95.319
  Top Layer w0.254: U1.85@108.443,109.626 115.309,109.626 116.477,110.794 C7.2@116.78,110.794 ; TF_CARD1.4@119.151,157.849 119.151,158.909 119.671,159.429 119.671,162.269 120.101,162.699 v1(121.621,162.699)
  Top Layer w0.26: U1.20@93.244,106.426 94.585,106.426 95.921,107.762 95.921,109.56 94.649,110.825 U1.9@93.244,110.825 ; U1.126@95.444,115.425 v1(95.444,114.059) 95.444,113.908 97.087,112.26 105.083,112.26 U1.102@105.045,115.425 ; U1.121@97.44,115.42 97.44,114.089 v1(97.461,114.069) ; 105.064,113.855 105.067,110.058 v1(105.254,109.872) 105.499,109.626 U1.85@108.443,109.626 ; U1.60@105.443,100.226 105.443,109.571 105.498,109.626
  Top Layer w0.28: v1(89.281,86.029) 90.13,86.888 U3.12@91.151,86.889 ; v1(89.591,90.999) 89.591,91.819 90.161,92.389 U3.1@91.151,92.389
  Top Layer w0.3: C57.2@62.65,126.299 R9.1@65.161,126.299 ; 62.81,127.439 62.921,127.548 66.62,127.548 67.45,128.379 R5.2@68.962,128.379 ; R20.2@74.421,120.359 77.321,120.359 v1(77.811,119.869) ; C27.2@83.444,91.189 82.931,91.702 D5.1@82.931,93.779 83.901,93.779 84.041,93.779 84.441,94.179 84.441,96.639 84.741,96.939 L1.1@87.321,96.939 ; R29.1@86.017,82.108 86.017,80.235 C30.2@86.001,80.219 86.963,80.219 87.633,80.889 U3.24@91.151,80.889 92.802,80.888 93.6,81.689 107.501,81.689 v1(108.031,82.219) ; v1(108.061,85.879) 108.551,85.389 U3.34@110.351,85.389 ; 108.061,86.889 108.92,86.889 U3.37@110.351,86.889 ; R25.2@116.131,153.019 116.521,152.629 v1(116.521,152.239) ; R26.2@117.991,153.009 117.991,152.439 v1(118.191,152.239) ; C32.1@118.375,82.323 118.375,83.5 ; v1(119.141,156.709) 119.141,157.899 119.191,157.949 ; v1(119.761,96.189) 119.761,95.579 R31.2@120.001,95.339 ; R70.2@119.811,153.029 119.881,152.959 v1(119.881,152.259) ; R71.2@122.011,153.029 122.211,152.829 v1(122.211,152.199) ; v1(125.081,152.829) 125.46,152.829 R72.2@125.661,153.029
  Top Layer w0.4: v1@85.036,91 v1(84.968,90.931) 84.968,86.617 ; R29.1@85.984,82.107 85.287,82.107 84.968,82.426 84.968,86.617 ; R28.2@86.111,86.044 85.541,86.044 84.968,86.617 ; U4.8@116.011,86.204 116.061,86.154 C31.1@116.061,83.499 ; C31.1@116.061,83.499 123.691,83.5 125.012,84.818 125.012,98.508 v1(124.971,98.509)
  Top Layer w0.5: C27.2@83.444,91.189 83.633,91 C29.1@86.111,91 86.153,90.958 v1(87.117,90.958) ; 95.921,109.56 97.041,110.68 v1(97.041,112.278) ; C25.2@110.221,153.047 110.44,152.829 C26.2@112.34,152.819 ; C26.2@112.341,152.819 v1(113.28,152.819) 114.05,152.819 R24.2@114.241,153.009 ; v1(117.941,96.139) 117.941,95.359 R32.2@117.961,95.339
  Top Layer w0.6: C2.2@82.583,119.606 83.348,119.606 v1(83.621,119.879) 83.676,119.823 C4.2@85.341,119.823 ; C7.2@116.781,110.795 C3.2@117.801,110.795 ; C3.2@117.801,110.779 118.781,110.779 C1.2@119.617,111.342 ; C1.2@119.617,111.358 119.617,111.3 R64.2@122.017,111.3
  Top Layer w0.8: L5.1@110.01,140.209 110.841,141.039 v1(110.841,141.059) 111.411,141.629 v1@111.411,149.439
  Top Layer w1: C57.2@62.65,126.299 62.65,125.859 63.381,125.128 74.542,125.128 pad.9@74.859,125.448
  Bottom Layer w0.254: v1(121.621,162.699) 122.456,162.699 U7.8@122.501,162.654
  Bottom Layer w0.26: v1(95.444,114.059) 95.454,114.069 v1(97.461,114.069)
  Bottom Layer w0.28: v1(87.117,90.958) 87.117,90.999 v1(89.591,90.999)
  Bottom Layer w0.3: v1(87.117,90.958) 87.117,88.666 86.412,87.93 86.42,86.322 86.713,86.029 v1(89.281,86.029) ; v1(108.031,82.219) 108.061,82.219 v1(108.061,85.879) ; v1(116.521,152.239) v1(118.191,152.239) 119.861,152.239 v1(119.881,152.259) 122.151,152.259 v1(122.211,152.199) 124.45,152.199 v1(125.081,152.829) ; v1(117.941,96.139) 119.761,96.139 v1(119.761,96.189) ; 119.142,152.199 119.142,152.603 v1@119.142,156.71
  Bottom Layer w0.4: v1@84.931,90.967 v1(84.968,90.931)
  Bottom Layer w0.5: v1@83.62,119.88 83.62,112.788 84.133,112.278 v1(97.041,112.278) 98.182,112.278 101.08,109.38 104.793,109.38 v1@105.256,109.867
  Bottom Layer w0.6: v1(118.571,110.769) 118.571,110.609 119.051,110.129 123.521,110.129 ; v1(124.971,98.509) 124.971,99.819 123.701,101.089 123.701,114.579 127.691,118.569 P1.3@128.06,118.569
  Bottom Layer w0.8: P2.4@64.151,118.569 66.691,118.569 68.72,120.599 70.011,120.599 pad.9@74.861,125.449 88.05,138.638 108.431,138.638 v1(110.841,141.059) ; v1(77.811,119.869) 77.821,119.879 v1(83.621,119.879) ; DEBUG.d@113.201,150.208 112.18,150.208 111.41,149.438 111.41,146.989 112.152,146.248 122.611,146.248 124.08,144.78 124.08,120.99 126.5,118.569 P1.3@128.06,118.569 ; DEBUG.d@113.201,150.209 113.281,150.289 v1(113.28,152.819) 116.521,152.819 v1(116.521,152.239)
  Bottom Layer w1: pad.9@74.861,125.449 77.811,122.498 v1@77.811,119.87 ; v1(77.811,119.869) 77.811,110.939 84.991,103.759 v1@84.991,90.967 ; P1.3@128.039,118.59 P1.3@128.061,118.569
  other v1: 111.411,149.439
+5V: C19.2 C20.2 C21.2 C190.1 C191.1 C192.1 C193.1 D6.2 L26.2 P1.1 P1.29 P1.31 P2.2 P3.18 P3.20 pad.8 pad.9@60.361,141.359 R11.1 R73.1 R74.2 R143.2 U13.3 U13.8 U13.11 U13.20 U13.23 USB2.1 USB2.5 | length 332.5
  Top Layer w0.28: 65.251,136.949 68.451,136.949 69.18,136.217 U13.20@70.318,136.218 ; 65.261,136.959 64.641,136.959 63.866,136.184 64.611,135.44 68.4,135.44 68.911,134.929 69.109,134.719 U13.23@70.318,134.72 ; U13.3@72.087,133.449 72.087,132.543 v1(72.401,132.229) ; U13.8@74.318,134.704 76.127,134.703 76.5,134.33 79.152,134.33 79.69,134.868 R73.1@80.16,134.868 ; U13.11@74.318,136.203 75.906,136.202 76.442,136.738 80.374,136.738 R11.1@80.414,136.697
  Top Layer w0.4: v1(68.331,148.859) 68.676,148.859 C193.1@69.921,147.614 ; R143.2@80.12,149.659 v1@80.13,148.889
  Top Layer w0.6: v1(79.551,133.169) 80.421,133.169 C20.2@80.421,132.799 ; v1(116.752,80.5) 131.28,80.5 132.329,81.546 132.329,122.021 131.4,122.948 129.01,122.948 128.06,121.998 P1.1@128.06,121.109 ; 128.061,80.5 P1.31@128.061,83.009
  Top Layer w0.8: v1(123.091,133.669) 123.111,133.649 v1(126.341,133.649)
  Top Layer w0.9: D6.2@90.311,169.791 pad.8@90.311,171.179
  Top Layer w1: v1(79.161,138.579) 80.141,138.579 C21.2@80.161,138.599 ; C21.2@80.392,138.498 C20.2@80.402,132.979
  Top Layer w1.2: pad.9@60.361,141.359 63.841,141.359 C191.1@63.911,141.289
  Bottom Layer w0.4: v1(68.331,148.859) 68.361,148.889 v1(80.131,148.889) ; v1(72.401,132.229) 76.751,132.229 77.691,133.169 v1(79.551,133.169)
  Bottom Layer w0.6: P3.20@111.811,78.029 114.281,78.029 v1(116.752,80.5)
  Bottom Layer w0.7: v1(63.091,139.519) 78.221,139.519 v1(79.161,138.579)
  Bottom Layer w0.8: USB2.5@117.087,133.679 123.081,133.679 v1(123.091,133.669)
  Bottom Layer w1: P3.18@109.271,78.029 P3.20@111.811,78.029 ; USB2.1@114.486,133.679 USB2.5@117.087,133.679 ; P1.31@128.061,83.009 P1.29@128.061,85.549
  Bottom Layer w1.2: P2.2@64.151,121.109 63.749,122.029 63.511,122.268 60.75,125.029 60.361,125.417 pad.9@60.361,141.359 60.361,162.567 65.812,168.018 89.772,168.018 90.31,168.559 pad.8@90.311,171.179 123.48,171.178 128.551,166.107 128.551,150 126.331,147.78 126.331,133.659 v1(126.341,133.649) 126.341,122.75 126.281,122.69 127.862,121.109 P1.1@128.06,121.109
ADC_3.3V: L1.2 U1.33 | length 7.3
  Top Layer w0.254: L1.2@88.72,96.939 88.72,97 90.628,97 93.838,100.218 U1.33@94.641,100.22
B1_1: B1.1 D4.1 | length 9.6
  Top Layer w0.3: v1(75.891,89.709) 81.841,95.659 D4.1@82.991,95.659
C196_1: C196.1 R146.2 | length 1.9
  Top Layer w0.5: R146.2@80.111,152.979 C196.1@80.111,154.859
D16_2: C195.1 D16.2 L26.1 U45.3 | length 26.9
  Top Layer w0.4: C195.1@61.621,159.148 60.47,159.148 59.51,158.188 59.51,152.308 62.509,149.309 L26.1@64.391,149.309
  Top Layer w1.1: L26.1@64.39,149.308 64.161,149.54 64.161,154.919 64.57,155.328 67.402,155.328 68.05,154.678 U45.3@70.361,154.678
DCIN: C16.2 C22.2 D17.2 D19.2 DC1.1 R144.1 U45.2 | length 21.1
  Top Layer w0.4: D19.2@76.066,164.8 78.248,162.618 79.65,162.618 80.14,162.128 80.14,159.359 80.712,158.788 83.351,158.788 83.711,158.43 R144.1@83.711,157.349
  Top Layer w1: C16.2@66.15,156.888 67.971,156.888 68.906,155.953 U45.2@69.819,155.954
  Top Layer w1.2: C22.2@62.111,156.849 62.151,156.889 C16.2@66.151,156.889
E3.3V: C28.2 C39.2 L5.2 R14.2 R17.2 R34.1 R35.1 R36.1 R38.2 R40.2 R41.2 R42.2 U5.1 U5.9 U5.19 | length 77.6
  Top Layer w0.18: 100.45,128.259 100.508,128.318 102.962,128.318 103.45,127.83 R36.1@103.45,127.66
  Top Layer w0.28: v1(98.301,136.409) 98.456,136.253 U5.1@99.131,136.253 ; R34.1@99.581,127.619 99.81,127.619 100.45,128.259 100.45,130.279 100.791,130.62 v1(100.791,130.749) 100.887,130.845 U5.9@100.887,133.022
  Top Layer w0.3: R17.2@93.541,145.859 94.552,145.859 v1(95.781,147.069) ; R35.1@97.731,127.619 R34.1@99.581,127.619
  Top Layer w0.4: U5.19@102.411,136.849 103.414,136.849 105.182,138.617 C28.2@105.819,138.617 ; U5.19@102.421,136.85 v1@103.424,136.85 ; U5.19@102.431,137.168 v1@103.433,137.168 ; U5.19@102.431,137.169 103.434,137.169 105.202,138.937 C28.2@105.839,138.937 ; v1@103.403,137.021 105.171,138.789 C28.2@105.811,138.789 ; R42.2@105.37,147.259 105.55,147.078 106.31,147.068 106.36,147.068 106.731,146.7 ; 106.701,138.808 106.771,138.878 v1(106.771,139.619) ; v1(106.731,143.239) 106.731,146.699 ; R14.2@107.311,135.179 107.311,134.239 v1(107.351,134.199)
  Top Layer w0.6: v1(95.781,147.069) 95.97,147.259 R38.2@96.571,147.259 ; R40.2@99.504,147.259 100.301,147.259 v1(100.491,147.069) ; v1(101.471,147.069) 101.661,147.259 R41.2@102.437,147.259
  Top Layer w0.78: C28.2@105.811,138.789 105.83,138.809 L5.2@110.01,138.809
  Bottom Layer w0.254: 103.62,134.199 v1(107.351,134.199)
  Bottom Layer w0.4: v1(95.781,147.069) v1(100.491,147.069) v1(101.471,147.069) v1(106.311,147.069) ; v1@98.262,136.408 v1(98.301,136.409) 98.301,131.648 98.84,131.109 100.79,131.109 ; v1(100.791,130.749) 100.791,131.109 ; v1@103.29,137.038 103.62,136.71 103.62,131.549 103.18,131.109 100.79,131.109 ; v1(106.731,143.239) 106.731,139.659 v1(106.771,139.619) ; 100.79,131.109 v1(100.791,130.749) 100.79,131.109
  other v1: 103.291,137.039
FB1: R2.1 R4.2 U13.14 | length 6.2
  Top Layer w0.28: R2.1@71.41,140.959 71.41,140.228 73.074,138.567 U13.14@73.074,137.449
  Top Layer w0.3: R4.2@69.401,140.949 R2.1@71.41,140.949
FB2: R7.1 R8.2 U13.5 | length 5.8
  Top Layer w0.28: R8.2@72.851,129.829 75.001,129.829 R7.1@75.011,129.839 ; U13.5@73.084,133.449 73.084,129.943 R8.2@73.191,129.839
FB3: R5.1 R6.2 U13.2 | length 5.9
  Top Layer w0.28: R6.2@70.882,129.799 70.882,130.619 71.585,131.325 U13.2@71.585,133.449
  Top Layer w0.3: R5.1@68.961,129.779 70.861,129.779 R6.2@70.881,129.799
GND: B1.2 C1.1 C2.1 C3.1 C4.1 C5.1 C6.1 C7.1 C8.1 C9.1 C10.1 C11.1 C12.1 C13.1 C14.1 C15.1 C16.1 C17.1 C18.1 C19.1 C20.1 C21.1 C22.1 C23.1 C25.1 C26.1 C27.1 C28.1 C29.2 C30.1 C31.2 C32.2 C33.2 C34.2 C35.2 C36.2 C37.2 C38.2 C39.1 C40.2 C41.1 C42.2 C43.1 C46.1 C47.1 C48.1 C49.1 C50.1 C57.1 C190.2 C191.2 C192.2 C193.2 C194.1 D16.1 D17.1 D19.1 DC1.2 DC1.3 DEBUG.b LED1.2 P1.2 P1.4 P1.32 P2.1 P2.31 P3.19 R1.1 R3.1 R4.1 R6.1 R8.1 R37.1 R45.1 R46.1 R47.1 R48.1 R49.1 R51.1 R52.1 R69.1 R145.1 R146.1 RJ1.8 RJ1.13 RJ1.14 SW1.1 SW1.2 SW1.3 SW1.4 SW2.1 SW2.2 SW3.1 TF_CARD1.6 TF_CARD1.10 TF_CARD1.11 TF_CARD1.12 TF_CARD1.13 U1.64 U1.95 U1.128 U3.2 U3.13 U3.23 U3.25 U3.36 U3.48 U4.4 U5.25 U7.4 U9.1 U13.1 U13.4 U13.6 U13.13 U13.18 U13.21 U13.25 U45.4 U45.9 UART0.1 USB1.0 USB1.5 USB2.0 USB2.4 USB2.8 X1.2 X1.4 X3.2 X3.4 | length 36.3
  Top Layer w0.24: U1.95@108.44,113.618 108.442,113.619 v1(110.081,113.619)
  Top Layer w0.28: U13.21@70.318,135.718 71.011,135.717 71.192,135.539 71.571,135.539 U13.25@71.832,135.539 ; U13.18@71.076,137.449 71.076,136.839 72.331,135.584 U13.25@72.331,135.449 ; U13.1@71.085,133.449 71.085,134.223 71.601,134.739 U13.25@71.832,134.739 ; U13.25@72.33,135.448 72.33,134.771 72.33,134.498 72.584,134.246 U13.4@72.584,133.449 ; U13.13@73.575,137.449 73.575,136.809 v1(73.098,136.332) 72.331,135.564 U13.25@72.331,135.449 ; U13.6@73.585,133.449 73.585,134.089 72.995,134.679 72.331,135.343 U13.25@72.331,135.449 ; X1.4@92.761,134.769 92.969,134.977 v1(92.969,135.789) C40.2@92.969,136.688 ; C41.1@94.645,131.337 94.645,132.626 X1.2@94.957,132.938 ; 105.219,121.487 106.17,122.439 X3.2@106.17,122.109 ; X3.4@108.371,120.509 108.6,120.739 C49.1@110.021,120.739
  Top Layer w0.3: v1(87.14,81.79) 87.541,81.389 U3.23@91.151,81.389 92.531,81.389 ; v1(91.781,94.869) 91.801,94.889 C47.1@91.801,95.535 91.801,95.298 92.37,94.729 97.232,94.729 97.641,95.138 C48.1@97.641,95.445 ; C48.1@97.641,95.445 97.641,94.829 v1(97.651,94.819)
  Top Layer w0.6: v1(79.691,116.689) 79.691,117.513 C8.1@79.751,117.573
  other v1: 85.979,76.269 85.979,76.929 85.979,77.588 105.371,80.529 106.061,80.559 106.741,80.559 87.14,82.45 97.691,82.439 98.391,82.439 99.061,82.449 112.621,85.659 112.601,86.389 94.391,87.019 95.051,87.019 95.711,87.019 86.081,88.699 71.131,89.639 71.651,90.199 94.231,90.409 94.961,90.409 95.681,90.409 122.441,91.189 123.171,91.199 109.461,93.609 110.301,93.629 87.101,94.359 87.761,94.359 88.421,94.359 108.6,96.499 109.44,96.519 110.24,96.539 89.961,100.799 90.661,100.799 89.261,100.819 100.651,105.649 101.696,105.649 102.741,105.649 121.731,108.509 84.721,109.479 83.301,109.499 84.021,109.499 125.211,111.569 124.591,112.179 120.501,116.539 119.681,116.559 84.361,117.659 85.021,117.659 85.681,117.659 92.961,121.309 93.591,121.319 97.001,121.959 93.191,125.739 98.611,125.889 97.691,125.899 110.891,129.438 67.171,129.849 110.891,130.483 67.171,130.509 87.036,130.619 88.081,130.619 95.801,131.169 67.151,131.189 87.026,131.359 88.071,131.359 110.892,131.528 107.301,132.199 94.901,132.229 100.331,134.539 101.101,134.539 101.871,134.539 71.601,134.679 72.33,134.679 73.111,134.679 71.574,135.459 72.334,135.459 73.091,135.459 100.341,135.599 101.111,135.599 101.881,135.599 71.581,136.329 72.339,136.332 133.18,137.26 133.18,138.305 133.18,139.35 93.651,143.769 94.696,143.769 95.741,143.769 108.87,144.457 108.87,145.502 82.471,146.499 83.516,146.499 84.561,146.499 108.87,146.547 82.501,147.389 83.546,147.389 84.591,147.389 119.591,148.139 120.636,148.139 121.681,148.139 100.981,149.119 100.981,149.924 100.981,150.729 72.111,154.315 72.771,154.314 73.441,154.305 72.771,155.359 73.441,155.35 72.111,155.36 73.441,156.395 72.111,156.405 72.771,156.404 121.351,156.769 121.341,158.679 88.301,159.239
GND1: R1.2 U1.32 | length 5.6
  Top Layer w0.254: R1.2@88.721,98.959 90.581,98.959 U1.32@93.241,101.619
LINK_LED: R45.2 RJ1.12 U5.3 | length 53.3
  Top Layer w0.254: R45.2@92.851,139.819 92.111,139.819 91.512,140.418 91.512,156.26 95.431,160.18 99.871,160.18 101.631,161.94 101.631,165.928 101.07,166.489 93.551,166.489 93.165,166.875 RJ1.12@93.166,168.372
  Top Layer w0.28: R45.2@92.851,139.819 92.85,139.039 93.592,138.3 95.472,138.3 95.819,137.95 95.819,137.238 97.806,135.252 U5.3@99.131,135.253
LX1: L4.2 U13.12
LX2: L2.2 U13.7
LX3: L7.2 U13.24
P2_3: P2.3 R27.1 | length 7.6
  Top Layer w0.254: P2.3@61.621,118.579 61.621,118.539 62.85,117.309 64.852,117.309 65.591,118.049 65.591,119.329 66,119.738 R27.1@66.871,119.739
P2_5: P2.5 R23.2 | length 13
  Top Layer w0.254: P2.5@61.771,116.039 61.621,116.039 60.62,116.039 60.082,116.578 60.082,119.308 60.62,119.849 65.271,119.849 65.7,120.279 65.7,121.3 66.051,121.648 R23.2@66.881,121.649
P2_6: P2.6 R33.1 | length 3.4
  Top Layer w0.3: P2.6@64.161,116.039 64.4,116.039 66.15,117.79 R33.1@66.851,117.789
P2_7: P2.7 R39.2 | length 6.2
  Top Layer w0.254: P2.7@61.621,113.499 62.901,114.759 65.182,114.759 66.282,115.859 R39.2@66.891,115.859
PA0: P2.9 U1.2 | length 33.8
  Top Layer w0.254: P2.9@61.621,110.959 62.86,109.72 67.123,109.72 71.016,113.619 U1.2@93.241,113.619
PA1: P2.12 U1.3 | length 31.8
  Top Layer w0.254: P2.12@63.831,108.209 66.701,108.209 71.692,113.2 U1.3@93.582,113.2
PA2: P2.11 U1.4 | length 34.5
  Top Layer w0.254: P2.11@61.621,108.419 62.853,107.188 66.681,107.188 72.312,112.821 U1.4@93.241,112.821
PA3: P2.14 U1.5 | length 31.8
  Top Layer w0.254: P2.14@64.161,105.879 66.422,105.879 72.962,112.42 U1.5@93.241,112.42
PA4: P2.13 U1.6 | length 35.2
  Top Layer w0.254: P2.13@61.621,105.879 62.883,104.62 66.013,104.62 73.452,112.021 U1.6@93.241,112.021
PA5: P2.16 U1.7 | length 32.5
  Top Layer w0.254: P2.16@64.161,103.339 65.71,103.339 73.988,111.617 U1.7@93.241,111.62
PA6: P2.15 U1.8 | length 35.9
  Top Layer w0.254: P2.15@61.621,103.339 62.901,102.059 65.319,102.059 74.473,111.206 U1.8@93.241,111.221
PA7: P2.18 U1.14 | length 32.4
  Top Layer w0.254: P2.18@64.161,100.799 64.971,100.799 72.993,108.821 U1.14@93.241,108.821
PA8: P2.17 U1.15 | length 35.8
  Top Layer w0.254: P2.17@61.621,100.799 62.911,99.509 64.57,99.509 73.483,108.419 U1.15@93.241,108.419
PA9: P2.20 U1.16 | length 33.2
  Top Layer w0.254: P2.20@64.161,98.259 64.11,98.259 73.871,108.021 U1.16@93.241,108.021
PA10: P2.19 U1.17 | length 37.6
  Top Layer w0.254: P2.19@61.621,98.259 62.921,96.959 65.301,96.959 65.903,97.561 65.893,99.222 74.303,107.619 U1.17@93.241,107.619
PA11: P2.22 U1.18 | length 35.2
  Top Layer w0.254: P2.22@64.161,95.719 65.512,95.719 66.48,96.695 66.48,98.93 74.727,107.221 U1.18@93.241,107.221
PA12: P2.21 U1.19 | length 38.7
  Top Layer w0.254: P2.21@61.601,95.719 61.799,95.719 62.848,94.609 65.583,94.604 66.983,95.996 66.98,98.635 75.223,106.819 U1.19@93.241,106.819
PB0: P2.32 U1.29 | length 38.8
  Top Layer w0.254: P2.32@64.161,83.019 64.931,83.019 67.796,85.882 67.788,88.488 72.088,92.793 73.518,92.796 83.541,102.819 U1.29@93.241,102.819
PB1: P1.26 U1.36 | length 42.9
  Top Layer w0.2: v1@94.72,98.099 95.84,99.217 U1.36@95.839,100.219
  Bottom Layer w0.2: v1(94.681,98.039) 94.682,97.538 95.162,97.058 97.521,97.058 98.641,98.178 120.071,98.178 126.401,91.849 129.491,91.849 P1.26@130.711,90.629
PB2: P1.24 U1.38 | length 39.6
  Top Layer w0.2: v1@96.341,98.099 96.64,98.398 U1.38@96.64,100.219
  Bottom Layer w0.2: v1(96.361,98.059) 96.874,98.059 97.973,99.22 120.625,99.22 125.38,94.386 129.37,94.389 130.6,93.169 P1.24@130.711,93.169
PB3: P1.23 U1.37 | length 38.4
  Top Layer w0.2: v1@95.56,98.099 95.56,98.259 96.241,98.938 U1.37@96.241,100.219
  Bottom Layer w0.2: v1@95.54,98.038 95.54,97.599 95.7,97.439 97.041,97.439 98.321,98.719 120.27,98.719 125.822,93.169 P1.23@128.171,93.169
  other v1: 95.541,98.039
PB4: P3.1 U1.31 | length 39
  Top Layer w0.254: v1(82.351,98.809) 85.563,102.021 U1.31@93.241,102.021
  Bottom Layer w0.3: v1(82.351,98.809) 82.351,86.799 83.901,85.249 83.901,80.949 87.371,77.479 87.371,75.839 87.721,75.489 P3.1@88.951,75.489
PB5: P1.25 U1.35 | length 41.6
  Top Layer w0.2: v1(93.761,98.219) 93.761,98.319 93.981,98.539 94.081,98.639 94.701,98.639 95.441,99.379 U1.35@95.441,100.219
  Bottom Layer w0.2: v1@93.76,98.219 93.76,97.66 94.161,97.238 94.682,96.718 98.161,96.718 99,97.558 119.99,97.558 126.922,90.629 P1.25@128.171,90.629
PB6: P3.2 U1.30 | length 36.6
  Top Layer w0.254: v1(83.011,100.389) 85.042,102.42 U1.30@93.241,102.42
  Bottom Layer w0.3: v1(83.011,100.389) 83.011,87.251 84.522,85.74 84.526,81.235 87.766,78.029 P3.2@88.951,78.029
PB7: P1.28 U1.34 | length 46.4
  Top Layer w0.2: v1(92.941,98.219) 92.942,98.478 93.511,99.049 94.631,99.049 95.042,99.461 U1.34@95.042,100.219
  Bottom Layer w0.2: v1(92.941,98.219) 92.942,97.678 94.26,96.36 98.601,96.36 99.32,97.078 119.751,97.078 127.519,89.309 129.37,89.309 130.6,88.089 P1.28@130.711,88.089
PB8: P1.27 U1.42 | length 44.5
  Top Layer w0.25: v1(97.641,103.279) 98.24,102.68 U1.42@98.24,100.219 ; v1(126.411,95.839) 126.411,89.309 127.631,88.089 P1.27@128.171,88.089
  Bottom Layer w0.25: v1@97.641,103.271 97.722,103.271 98.42,103.982 101.42,103.982 104.981,100.418 121.771,100.418 126.348,95.841 v1(126.411,95.839)
PB13: P1.10 U1.93 | length 29
  Top Layer w0.254: U1.93@108.44,112.82 110.382,112.82 111.611,114.049 v1(111.611,115.309) ; v1(115.561,115.139) 115.7,115.138 117.971,117.409 122.728,117.409 125.065,115.072 125.07,113.192 126.228,112.029 129.833,112.029 130.414,110.949 P1.10@130.711,110.949
  Bottom Layer w0.254: v1(111.611,115.309) 111.781,115.139 v1(115.561,115.139)